# Altium PCB NEW_PCB_2021-06-03.pcbdoc
Units mm, origin at the board's own origin, x right, y up, seen from the top; angles counter-clockwise.
Board outline 165.35 x 235.05 mm, 2 copper layers (Top Layer, Bottom Layer); 28 components, 61 nets, 120 pads, 18 vias.
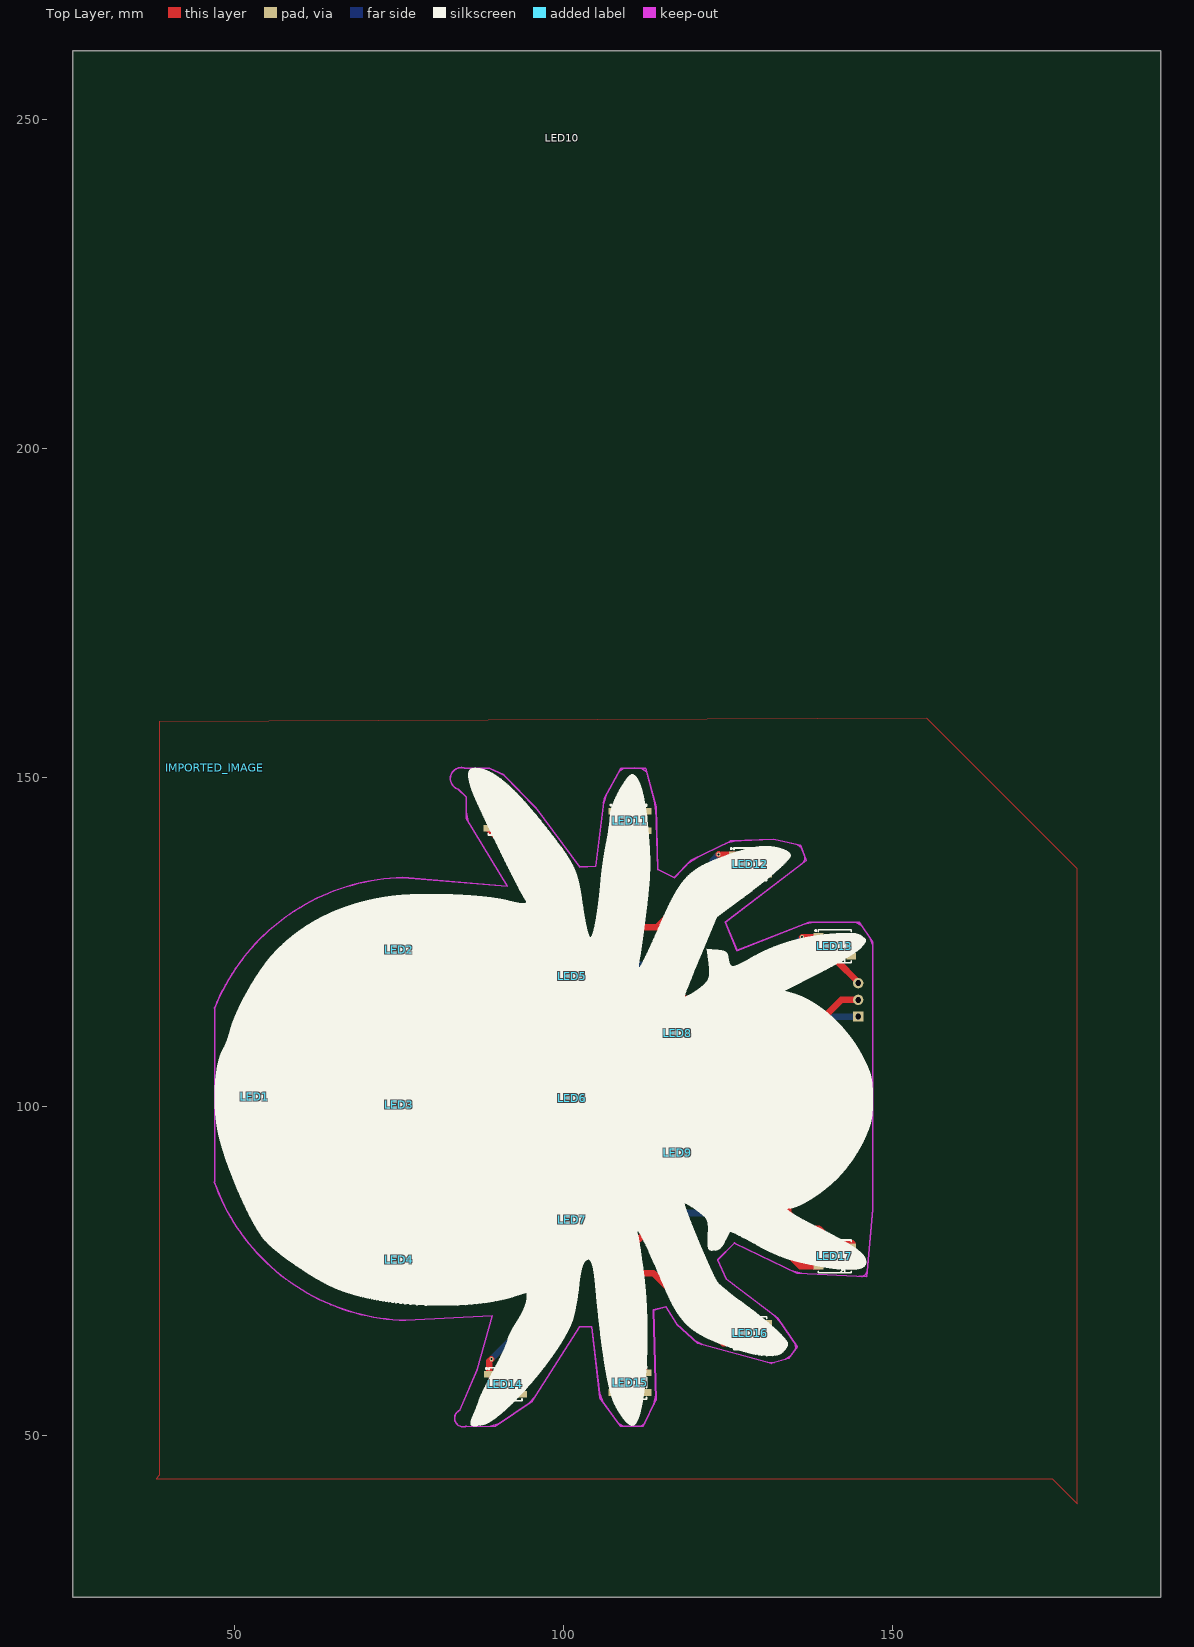
[diagram p0: Top Layer view]
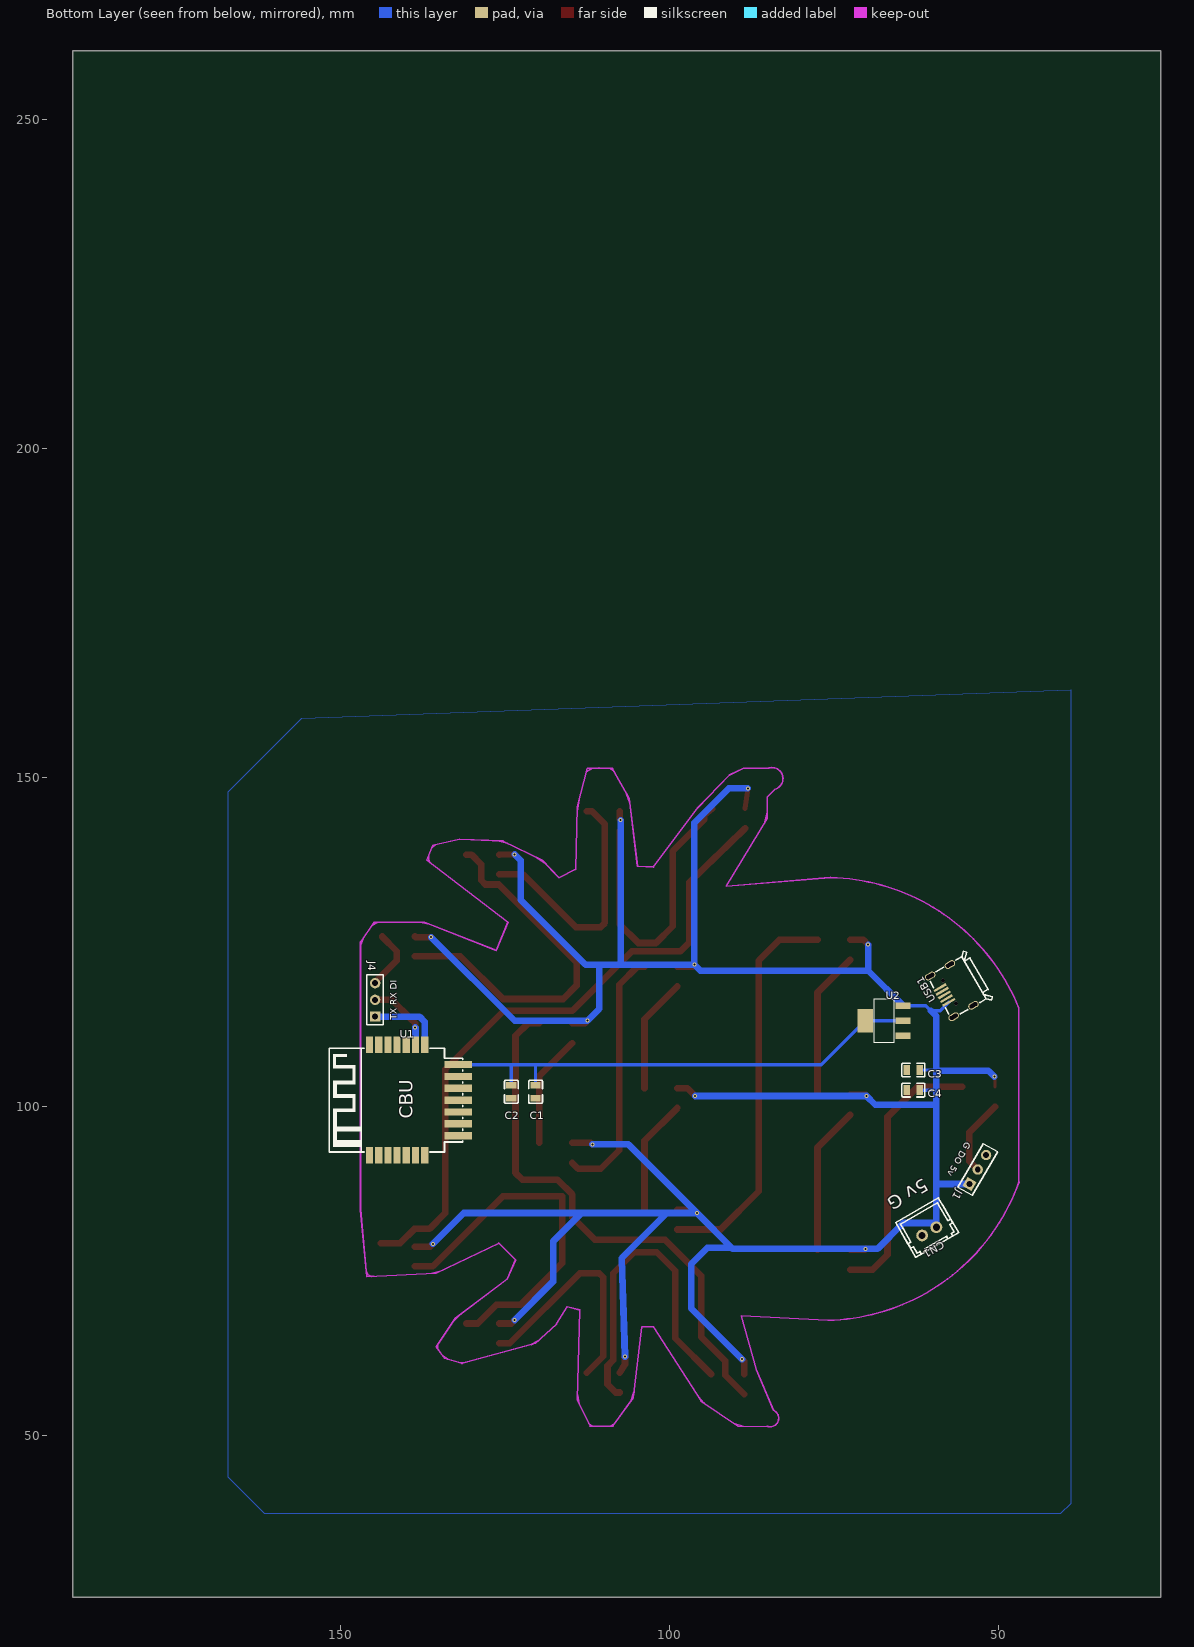
[diagram p1: Bottom Layer view, seen from below]

## Layer stack, top to bottom
Top Layer: signal copper (thickness not stored)
Dielectric: dielectric 0.32, FR-4, Dk 4.8
Bottom Layer: signal copper (thickness not stored)

## Board outline
190.754,25.4 25.4,25.4 25.4,260.45 190.754,260.45

## Components (designator, comment, footprint, x,y, rotation, side; value= is the part's Value field where it differs from the comment)
C1 "10uf" C0805 120.396,102.235 r270 bottom
C2 "0.1uf" C0805 124.079,102.235 r270 bottom
C3 "10uf" C0805 62.992,105.537 r0 bottom
C4 "0.1uf" C0805 62.992,102.489 r0 bottom
CN1 "GP01-2503WV-2P" CONN-TH_2P-P2.50_HX25003-2A 60.579,81.026 r150 bottom
IMPORTED_IMAGE "IMPORTED_IMAGE" IMPORTED_IMAGE 46.99,151.435 r0 top
J1 "HDR-M-2.54_1x3" HDR-M-2.54_1X3 53.213,90.424 r300 bottom
J4 "HDR-M-2.54_1x3" HDR-M-2.54_1X3 144.78,116.205 r270 bottom
LED1 "WS2812B" LED-SMD_4P-L5.0-W5.0-TL 53.086,101.473 r0 top
LED2 "WS2812B" LED-SMD_4P-L5.0-W5.0-TL 75.057,123.825 r0 top
LED3 "WS2812B" LED-SMD_4P-L5.0-W5.0-TL 75.057,100.266 r0 top
LED4 "WS2812B" LED-SMD_4P-L5.0-W5.0-TL 75.057,76.708 r0 top
LED5 "WS2812B" LED-SMD_4P-L5.0-W5.0-TL 101.346,119.761 r0 top
LED6 "WS2812B" LED-SMD_4P-L5.0-W5.0-TL 101.346,101.282 r0 top
LED7 "WS2812B" LED-SMD_4P-L5.0-W5.0-TL 101.346,82.804 r0 top
LED8 "WS2812B" LED-SMD_4P-L5.0-W5.0-TL 117.348,111.125 r0 top
LED9 "WS2812B" LED-SMD_4P-L5.0-W5.0-TL 117.348,92.964 r0 top
LED10 "WS2812B" LED-SMD_4P-L5.0-W5.0-TL 91.059,143.764 r0 top
LED11 "WS2812B" LED-SMD_4P-L5.0-W5.0-TL 110.109,143.383 r0 top
LED12 "WS2812B" LED-SMD_4P-L5.0-W5.0-TL 128.397,136.779 r0 top
LED13 "WS2812B" LED-SMD_4P-L5.0-W5.0-TL 141.224,124.333 r0 top
LED14 "WS2812B" LED-SMD_4P-L5.0-W5.0-TL 91.186,57.785 r0 top
LED15 "WS2812B" LED-SMD_4P-L5.0-W5.0-TL 110.109,58.039 r0 top
LED16 "WS2812B" LED-SMD_4P-L5.0-W5.0-TL 128.397,65.532 r0 top
LED17 "WS2812B" LED-SMD_4P-L5.0-W5.0-TL 141.224,77.216 r0 top
U1 "CBU" CBU 138.938,100.965 r0 bottom
U2 "AMS1117-3.3" SOT-223-3_L6.5-W3.4-P2.30-LS7.0-BR 67.437,113.03 r0 bottom
USB1 "KH-MICRO-SMT.ZJ-5P" MICRO-USB-SMD_KH-MICRO-SMT.ZJ-5P 57.15,117.602 r240 bottom

## Footprints (in the part's own frame and the unit in brackets; to place one, negate y for a bottom-side part, rotate by r counter-clockwise, add the part's x,y. Pads: shape width x height; smd on the part's side, far side on the other; paste and mask are expansions set on the pad)
C0805 [mm]
  rect 1x1.55 smd: 1(1,0) 2(-1,0)
  silkscreen extent -1.75,-1.04 1.75,1.04
CBU [mm]
  rect 1.1x2.5 smd: 1(6.7,8.4) 2(5.3,8.4) 3(3.9,8.4) 4(2.5,8.4) 5(1.1,8.4) 6(-0.3,8.4) 7(-1.7,8.4) 15(-1.7,-8.4) 16(-0.3,-8.4) 17(1.1,-8.4) 18(2.5,-8.4) 19(3.9,-8.4) 20(5.3,-8.4) 21(6.7,-8.4)
  rect 4.2x1.1 smd: 8(-6.8,5.4) 9(-6.8,3.6) 10(-6.8,1.8) 11(-6.8,0) 12(-6.8,-1.8) 13(-6.8,-3.6) 14(-6.8,-5.4)
  silkscreen extent -7.49,-7.87 12.83,7.87
CONN-TH_2P-P2.50_HX25003-2A [mm]
  round 1.8 hole 1.1: 1(1.25,0)
  round 1.8 hole 1.082: 2(-1.25,0)
  silkscreen extent -3.75,-2.41 3.75,3.7
HDR-M-2.54_1X3 [mil]
  rect 62x62 hole 35: 1(100,0)
  round 62 hole 35: 2(0,0) 3(-100,0)
  silkscreen extent -150,-50 150,50
IMPORTED_IMAGE [mm]
  silkscreen extent 0,-100 100,0
LED-SMD_4P-L5.0-W5.0-TL [mm]
  rect 1.5x1 smd: 1(-2.5,1.5) 2(-2.5,-1.5) 3(2.5,-1.5) 4(2.5,1.5)
  silkscreen extent -3,-2.5 2.5,2.5
MICRO-USB-SMD_KH-MICRO-SMT.ZJ-5P [mm]
  rect 0.4x2.15 smd: 1(1.3,-1.305) 2(0.65,-1.305) 3(0,-1.305) 4(-0.65,-1.305) 5(-1.3,-1.305)
  oval 1x1.7 hole 0.6 slot 1.3 at 90 deg: 6(-3.575,-1.735) 7(-3.575,1.735) 8(3.575,1.735) 9(3.575,-1.735)
  round 0.6 hole 0.6 unplated: ""(-2,-0.415) ""(2,-0.415)
  silkscreen extent -4.26,-2.16 4.22,4.87
SOT-223-3_L6.5-W3.4-P2.30-LS7.0-BR [mm]
  rect 2.34x0.98 smd: 1(-2.87,2.3) 2(-2.87,0) 3(-2.87,-2.3)
  rect 2.34x3.6 smd: 4(2.87,0)
  silkscreen extent -1.47,-3.33 1.47,3.33

## Via types
v1: diameter 0.61, hole 0.305, Top Layer to Bottom Layer, 18 vias

## Nets (pads, with @x,y where several pads share a name; then routed paths per layer and width w, separated by ;. In a path a pad name is that pad's centre, name@x,y a point inside that pad or via, vN(x,y) a via of type N, cw(c..) or ccw(c..) an arc to the next point about the centre after c; other vN are vias at no path point)
3.3V: C1.2 C2.2 U1.14 U2.2 U2.4 | length 76.6
  Bottom Layer w0.5: U2.2 U2.4 76.972,106.365 U1.14 ; C1.2 120.396,106.365 ; C2.2 124.079,106.365
5V: C3.2 C4.2 CN1.1 J1.1 LED1.1 LED2.1 LED3.1 LED4.1 LED5.1 LED6.1 LED7.1 LED8.1 LED9.1 LED10.1 LED11.1 LED12.1 LED13.1 LED14.1 LED15.1 LED16.1 LED17.1 U2.3 USB1.1 | length 482.5
  Top Layer w0.5: LED1.1@50.586,102.973 50.586,104.434 v1(50.673,104.521)
  Top Layer w0.762: v1(88.138,148.336) LED10.1@88.559,145.264
  Top Layer w1: v1(69.85,124.587) 70.588,125.325 LED2.1@72.557,125.325 ; v1(70.104,101.6) 70.27,101.766 LED3.1 ; v1(70.231,78.359) 70.382,78.208 LED4.1@72.557,78.208 ; LED14.1@88.686,59.285 88.686,61.254 v1(89.027,61.595) ; v1(95.885,83.82) 96.368,84.305 LED7.1 ; v1(96.139,101.6) 97.321,102.782 LED6.1 ; v1(96.266,121.539) 96.544,121.261 LED5.1@98.846,121.261 ; v1(106.807,61.976) 106.807,60.833 LED15.1 ; v1(107.481,143.51) 107.609,143.638 LED11.1@107.609,144.883 ; v1(111.76,94.234) 111.99,94.464 LED9.1@114.848,94.464 ; v1(112.522,113.03) 112.927,112.625 LED8.1@114.848,112.625 ; v1(123.571,67.564) 124.103,67.032 LED16.1@125.897,67.032 ; v1(123.571,138.303) LED12.1 ; v1(136.017,79.121) 136.422,78.716 LED17.1@138.724,78.716 ; v1(136.271,125.73) 138.621,125.73 LED13.1@138.724,125.833
  Bottom Layer w0.5: USB1.1 58.9,114.554 60.325,114.554 61.101,115.33 U2.3 ; 59.497,102.489 C4.2 ; 59.497,105.537 C3.2
  Bottom Layer w1: v1(50.673,104.521) 51.597,105.445 59.497,105.445 ; J1.1 59.497,88.224 ; 59.497,100.27 68.774,100.27 v1(70.104,101.6) v1(96.139,101.6) ; 60.325,114.554 59.496,113.725 CN1.1 60.141,82.296 64.516,82.296 68.453,78.359 v1(70.231,78.359) 90.424,78.359 v1(95.885,83.82) ; U2.3 69.85,120.613 ; v1(69.85,124.587) 69.85,120.613 ; v1(88.138,148.336) 91.059,148.336 96.266,143.129 96.266,136.101 ; v1(89.027,61.595) 96.774,69.342 96.774,76.032 94.28,78.527 90.592,78.527 ; 96.266,136.1 v1(96.266,121.539) ; v1(106.807,61.976) 107.315,76.962 100.457,83.82 ; 107.481,121.539 v1(107.481,143.51) ; 110.729,121.539 110.729,114.823 v1(112.522,113.03) 123.571,113.03 v1(136.271,125.73) ; v1(111.76,94.234) 106.299,94.234 v1(95.885,83.82) ; v1(123.571,67.564) 117.729,73.406 117.729,73.66 117.729,79.502 113.411,83.82 ; v1(123.571,138.303) 122.682,137.414 122.682,131.42 112.801,121.539 v1(96.266,121.539) ; v1(136.017,79.121) 131.318,83.82 113.411,83.82 ; 69.85,120.613 95.34,120.613 v1(96.266,121.539) ; v1(95.885,83.82) 100.457,83.82 ; 100.457,83.82 113.411,83.82
DI: J4.3 LED13.4 | length 9.4
  Top Layer w1: LED13.4@143.724,125.833 141.478,123.587 141.478,122.174 144.78,118.872 J4.3
DO: J1.2 LED1.2 | length 11.7
  Top Layer w1: LED1.2 54.483,96.076 54.483,91.694 J1.2
GND: C1.1 C2.1 C3.1 C4.1 CN1.2 J1.3 LED1.3 LED2.3 LED3.3 LED4.3 LED5.3 LED6.3 LED7.3 LED8.3 LED9.3 LED10.3 LED11.3 LED12.3 LED13.3 LED14.3 LED15.3 LED16.3 LED17.3 U1.13 U2.1 USB1.5 USB1.6 USB1.7 USB1.8 USB1.9
LED1_4: LED1.4 LED4.2 | length 40.7
  Top Layer w1: LED1.4@55.586,102.973 62.381,102.973 66.929,98.425 66.929,77.47 69.191,75.208 LED4.2
LED2_2: LED2.2 LED3.4 | length 22.6
  Top Layer w1: LED2.2 77.557,117.325 LED3.4
LED2_4: LED2.4 LED7.2 | length 60.1
  Top Layer w1: LED2.4@77.557,125.325 83.336,125.325 86.487,122.174 86.487,87.122 92.305,81.304 LED7.2
LED3_2: LED3.2 LED4.4 | length 22.6
  Top Layer w1: LED3.2@72.557,98.767 77.557,93.767 LED4.4@77.557,78.208
LED5_2: LED5.2 LED6.4 | length 17.5
  Top Layer w1: LED5.2 103.846,113.261 LED6.4
LED5_4: LED5.4 LED9.2 | length 38.8
  Top Layer w1: LED5.4@103.846,121.261 104.926,121.261 107.696,118.491 107.696,93.345 110.49,90.551 113.935,90.551 LED9.2
LED6_2: LED6.2 LED7.4 | length 17.5
  Top Layer w1: LED6.2@98.846,99.783 103.846,94.783 LED7.4@103.846,84.304
LED8_2: LED8.2 LED9.4 | length 17.2
  Top Layer w1: LED8.2 119.848,104.625 LED9.4@119.848,94.464
LED8_4: LED8.4 LED14.2 | length 82.6
  Top Layer w1: LED14.2 91.567,59.166 91.567,61.341 95.25,65.024 95.25,74.295 100.711,79.756 111.379,79.756 114.808,83.185 114.808,86.614 117.094,88.9 122.428,88.9 123.444,89.916 123.444,110.744 121.563,112.625 LED8.4@119.848,112.625
LED10_2: LED10.2 LED17.4 | length 99.5
  Top Layer w1: LED10.2@88.56,142.263 97.028,134.048 97.028,124.968 98.425,123.571 105.791,123.571 114.808,114.554 125.222,114.554 134.112,105.664 134.112,83.82 136.525,81.407 138.811,81.407 140.97,79.248 143.891,79.248
LED10_4: LED10.4 LED11.2 | length 44.9
  Top Layer w1: LED10.4 94.742,144.335 94.742,143.637 99.568,138.811 99.568,127.381 102.108,124.841 104.775,124.841 107.61,127.676 LED11.2@107.61,141.882
LED11_4: LED11.4 LED12.2 | length 38.2
  Top Layer w1: LED11.4@112.609,144.883 111.863,144.883 109.855,142.875 109.855,127.889 110.49,127.254 114.3,127.254 122.325,135.279 LED12.2
LED12_4: LED12.4 LED13.2 | length 56.6
  Top Layer w1: LED12.4@130.897,138.279 130.151,138.279 128.651,136.779 128.651,134.366 128.016,133.731 125.984,133.731 114.173,121.92 114.173,118.364 116.205,116.332 125.349,116.332 131.85,122.833 LED13.2
LED14_4: LED14.4 LED15.2 | length 49.6
  Top Layer w1: LED14.4@93.686,59.285 99.187,64.786 99.187,75.057 101.981,77.851 105.41,77.851 108.585,74.676 108.585,61.468 109.474,60.579 109.474,57.785 108.228,56.539 LED15.2
LED15_4: LED15.4 LED16.2 | length 36
  Top Layer w1: LED15.4@112.609,59.539 110.109,62.039 110.109,74.041 110.744,74.676 113.665,74.676 124.309,64.032 LED16.2
LED16_4: LED16.4 LED17.2 | length 55.3
  Top Layer w1: LED16.4@130.897,67.032 129.183,67.032 126.365,69.85 122.682,69.85 116.332,76.2 116.332,86.36 125.349,86.36 135.993,75.716 LED17.2
RX: J4.2 U1.16 | length 10.9
  Top Layer w1: v1(138.684,112.014) 138.684,112.649 139.319,113.284 142.24,116.205 J4.2
  Bottom Layer w1: U1.16 138.638,111.968 v1(138.684,112.014)
S$2733: 
S$2813: 
S$2815: 
S$2817: 
S$2819: 
S$2821: 
S$2823: 
S$2825: 
S$2827: 
S$2829: 
S$2831: 
S$2833: 
S$2835: 
S$2838: 
S$2840: 
S$2842: 
S$2844: 
S$2846: 
S$2848: 
S$2850: 
S$2852: 
S$2854: 
S$2856: 
S$2858: 
S$2860: 
S$2862: 
S$2864: 
S$2866: 
S$2868: 
S$2870: 
S$2872: 
S$2874: 
S$2876: 
S$2878: 
S$2881: 
S$2883: 
S$2885: 
S$2887: 
TX: J4.1 U1.15 | length 11.4
  Bottom Layer w1: U1.15 137.239,112.855 138.049,113.665 J4.1
pads on no net: U1.1 U1.2 U1.3 U1.4 U1.5 U1.6 U1.7 U1.8 U1.9 U1.10 U1.11 U1.12 U1.17 U1.18 U1.19 U1.20 U1.21 USB1. USB1.2 USB1.3 USB1.4

## Polygon pours and split planes (outlines as drawn)
GND on Top Layer (solid): 38.608,158.496 38.608,43.942 38.1,43.434 174.244,43.434 178.054,39.624 178.054,136.144 155.194,159.004
GND on Bottom Layer (solid): 39.116,163.322 39.116,39.624 40.64,38.1 161.544,38.1 167.132,43.688 167.132,147.828 155.956,159.004

## Keep-outs
Keep-Out Layer:
  lines w0.254 net S$2733: 46.947,88.534 ccw(c76.738,99.107) 76.005,67.504 ; 46.981,114.979 cw(c76.311,103.185) 75.577,134.789 ; 84.023,148.214 cw(c84.478,149.824) 84.933,151.435 ; 84.251,53.846 ccw(c84.767,52.641) 85.283,51.435

## Silkscreen, mask and mechanical layers (free items; w line width, h text height)
Bottom Overlay:
  text "TX RX DI" at 141.524,113.16 h1.02 r270
  text "G DO 5v" at 55.05,94.742 h1.02 r120
  text "5v G" at 61.468,89.145 h2.03 r150